# Altium PCB Power_Box_V1.PcbDoc (part 1 of 2)
Units mm, origin at the board's own origin, x right, y up, seen from the top; angles counter-clockwise.
Board outline 100 x 80 mm, 2 copper layers (Top Layer, Bottom Layer); 207 components, 130 nets, 583 pads, 162 vias.
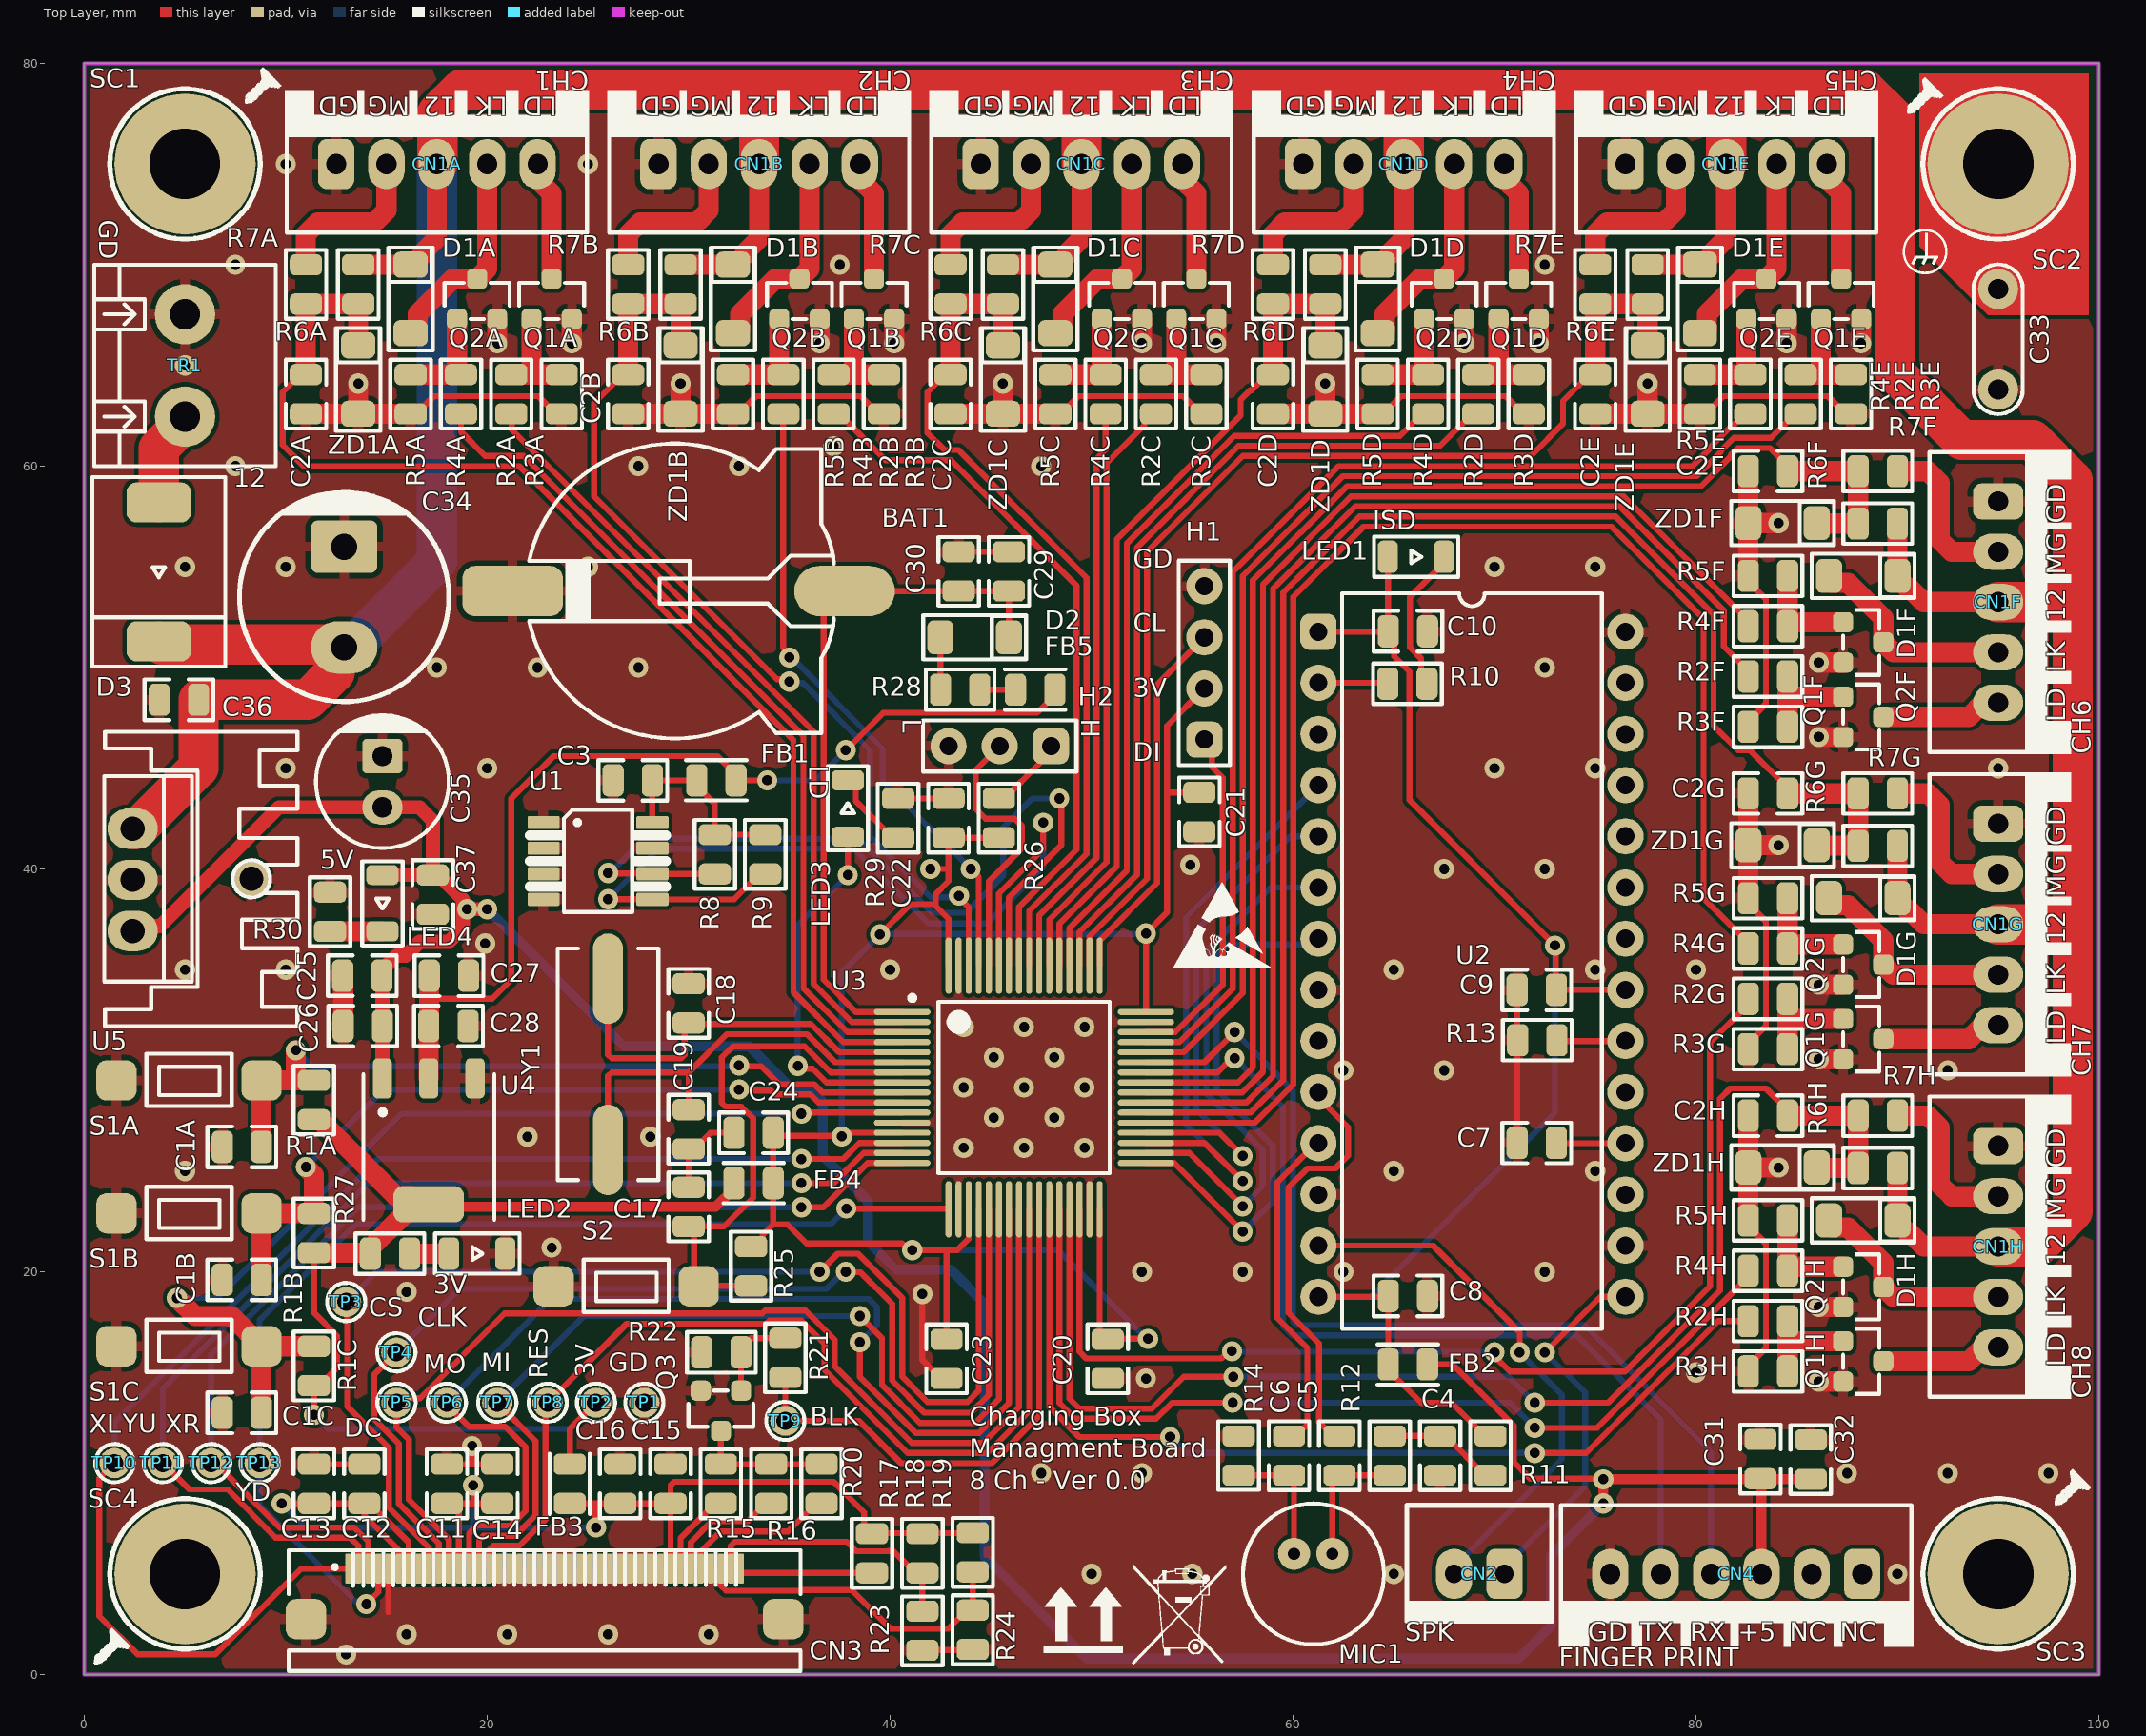
[diagram p0: Top Layer view]
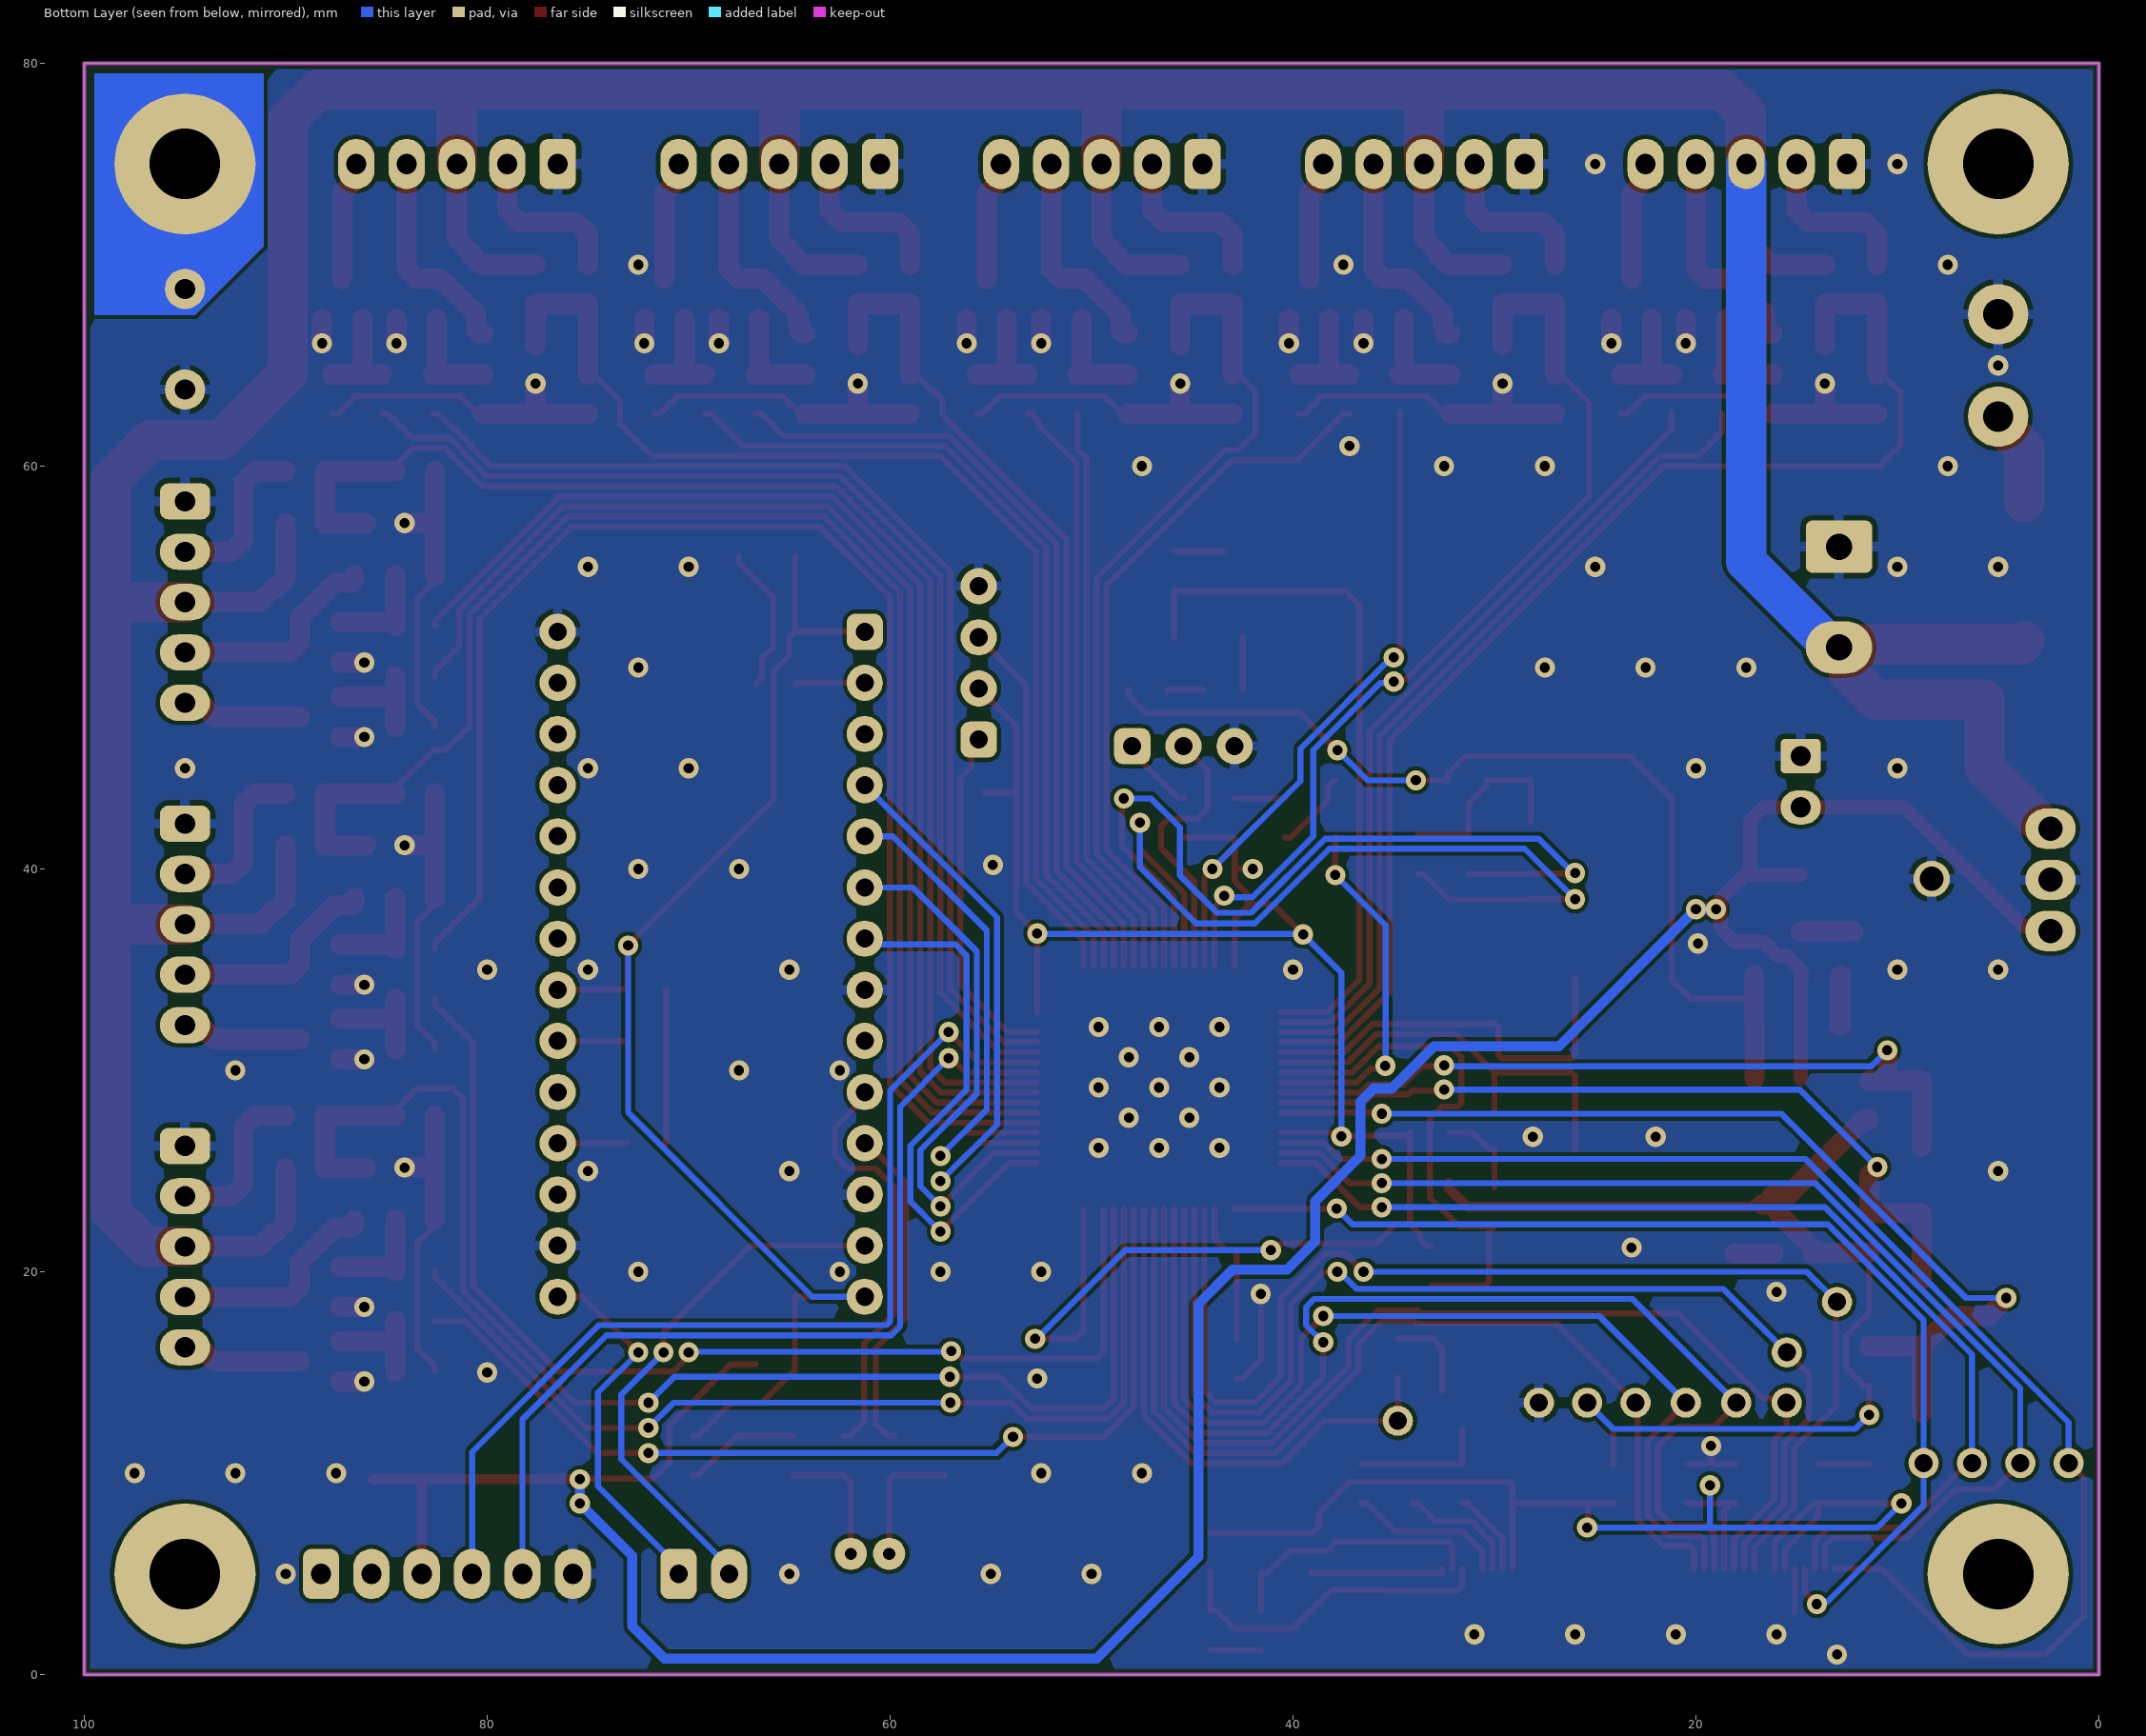
[diagram p1: Bottom Layer view, seen from below]
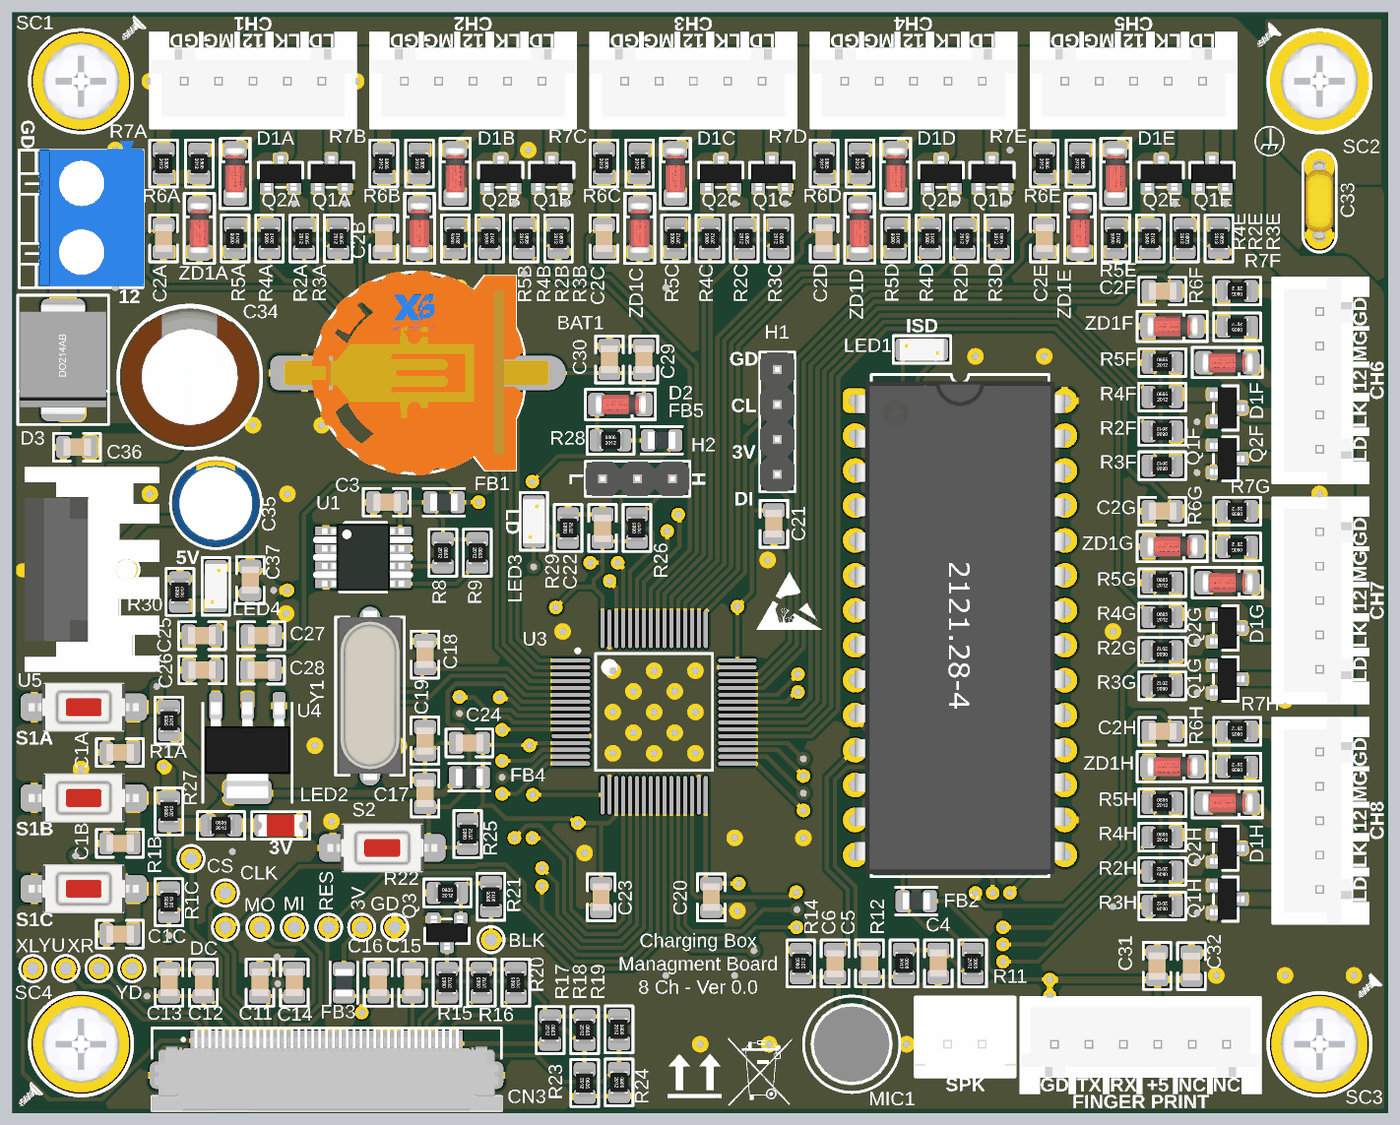
[diagram p3: 3D render of the assembled board from above, using the file's embedded part models]

## Layer stack, top to bottom
Top Solder: solder mask 0.0102, Solder Resist, Dk 3.5
Top Layer: signal copper 0.0356
Dielectric 1: dielectric 0.32, FR-4, Dk 4.8
Bottom Layer: signal copper 0.0356
Bottom Solder: solder mask 0.0102, Solder Resist, Dk 3.5

## Board outline
0,0 100,0 100,80 0,80

## Design rules (kind name [scope] priority, off if disabled: settings)
Clearance [All] p1: gap=0.2 ignorepadtopadclearanceinfootprint=TRUE
ComponentClearance ComponentClearance_ISD [InComponent('U2')] p1: gap=0.254 collisioncheckmode=3 verticalgap=0.1 showdistances=FALSE
ComponentClearance ComponentClearance_STM [InComponent('U3')] p2: gap=4 collisioncheckmode=3 verticalgap=0.254 showdistances=FALSE checkcomponentboundary=TRUE
ComponentClearance [All] p3: gap=0.2 collisioncheckmode=3 verticalgap=0.254 showdistances=FALSE checkcomponentboundary=TRUE
DiffPairsRouting [All] p1: maxlimit=0.3 minlimit=0.2 mostfreqgap=0.3 toplayer_minwidth=0.3 toplayer_maxwidth=0.5 toplayer_prefwidth=0.3 bottomlayer_minwidth=0.3 bottomlayer_maxwidth=0.5 bottomlayer_prefwidth=0.3 maxuncoupledlength=12.7
Height [All] p1: minheight=0 maxheight=25.4 prefheight=17.2
HoleToHoleClearance [All] p1: gap=0.2 allowstackedmicrovias=TRUE
MinimumSolderMaskSliver [All] p1: minsoldermaskwidth=0.2
PlaneConnect [All] p1: pad.planeconnectstyle=Relief pad.reliefexpansion=0.508 pad.reliefentries=4 pad.reliefconductorwidth=0.5 pad.reliefairgap=0.254 via.planeconnectstyle=Direct via.reliefexpansion=0.508 via.reliefentries=4 via.reliefconductorwidth=0.254 via.reliefairgap=0.254
PolygonConnect [All] p1: thpad.connectstyle=Relief thpad.reliefconductorwidth=0.5 thpad.reliefentries=4 thpad.polygonreliefangle="90 Angle" thpad.airgapwidth=0.254 smdpad.connectstyle=Relief smdpad.reliefconductorwidth=0.5 smdpad.reliefentries=4 smdpad.polygonreliefangle="90 Angle" smdpad.airgapwidth=0.254 via.connectstyle=Direct via.reliefconductorwidth=0.254 via.reliefentries=4 via.polygonreliefangle="90 Angle" via.airgapwidth=0.254
RoomDefinition CHANNELG [InComponentClass('CHANNELG')] p1: confinementstyle=ConfineIn formatcopy=TRUE lockcomponents=FALSE outline 81.5,61.25 81.5,45.25 100,45.25 100,61.25
RoomDefinition CHANNELH [InComponentClass('CHANNELH')] p2: confinementstyle=ConfineIn formatcopy=TRUE lockcomponents=FALSE outline 81.5,45.25 81.5,29.25 100,29.25 100,45.25
RoomDefinition CHANNELI [InComponentClass('CHANNELI')] p3: confinementstyle=ConfineIn formatcopy=TRUE lockcomponents=FALSE outline 81.5,29.25 81.5,13.25 100,13.25 100,29.25
RoomDefinition CHANNELB [InComponentClass('CHANNELB')] p4: confinementstyle=ConfineIn formatcopy=FALSE lockcomponents=FALSE outline 9.5,61.5 25.5,61.5 25.5,80 9.5,80
RoomDefinition CHANNELC [InComponentClass('CHANNELC')] p5: confinementstyle=ConfineIn formatcopy=TRUE lockcomponents=FALSE outline 25.5,61.5 41.5,61.5 41.5,80 25.5,80
RoomDefinition CHANNELD [InComponentClass('CHANNELD')] p6: confinementstyle=ConfineIn formatcopy=TRUE lockcomponents=FALSE outline 41.5,61.5 57.5,61.5 57.5,80 41.5,80
RoomDefinition CHANNELE [InComponentClass('CHANNELE')] p7: confinementstyle=ConfineIn formatcopy=TRUE lockcomponents=FALSE outline 57.5,61.5 73.5,61.5 73.5,80 57.5,80
RoomDefinition CHANNELF [InComponentClass('CHANNELF')] p8: confinementstyle=ConfineIn formatcopy=TRUE lockcomponents=FALSE outline 73.5,61.5 89.5,61.5 89.5,80 73.5,80
RoomDefinition TFT [InComponentClass('TFT')] p9: confinementstyle=ConfineOut formatcopy=TRUE lockcomponents=FALSE outline 149,139 344,139 344,169 149,169
RoomDefinition STM_AUX [InComponentClass('STM_AUX')] p10: confinementstyle=ConfineOut formatcopy=TRUE lockcomponents=FALSE outline 149,103 399,103 399,138 149,138
RoomDefinition Power [InComponentClass('Power')] p11: confinementstyle=ConfineOut formatcopy=TRUE lockcomponents=FALSE outline 149,83 225,83 225,102 149,102
RoomDefinition MCU [InComponentClass('MCU')] p12: confinementstyle=ConfineOut formatcopy=TRUE lockcomponents=FALSE outline 275.2,46.6 326,46.6 326,72 275.2,72
RoomDefinition KEYD [InComponentClass('KEYD')] p13: confinementstyle=ConfineIn formatcopy=TRUE lockcomponents=FALSE outline 0,11.8 12.6,11.8 12.6,18.3 0,18.3
RoomDefinition KEYC [InComponentClass('KEYC')] p14: confinementstyle=ConfineIn formatcopy=TRUE lockcomponents=FALSE outline 0,18.4 12.6,18.4 12.6,24.9 0,24.9
RoomDefinition KEYB [InComponentClass('KEYB')] p15: confinementstyle=ConfineIn formatcopy=FALSE lockcomponents=FALSE outline 0,25 12.6,25 12.6,31.5 0,31.5
RoomDefinition ISD1730 [InComponentClass('ISD1730')] p16: confinementstyle=ConfineOut formatcopy=TRUE lockcomponents=FALSE outline 157.8,39.9 268.8,39.9 268.8,80.9 157.8,80.9
RoomDefinition Interface [InComponentClass('Interface')] p17: confinementstyle=ConfineOut formatcopy=TRUE lockcomponents=FALSE outline 166,19 228,19 228,40 166,40
RoomDefinition EEPROM [InComponentClass('EEPROM')] p18: confinementstyle=ConfineOut formatcopy=TRUE lockcomponents=FALSE outline 149,8 177,8 177,17 149,17
RoutingVias [All] p1: holewidth=0.5 width=1 viastyle="Through Hole" minholewidth=0.5 minwidth=1 maxholewidth=0.711 maxwidth=1.27
SilkToSilkClearance [All] p1: silktosilkclearance=0.2
SilkToSolderMaskClearance [IsPad] p1: minsilkscreentomaskgap=0.2 clearancetoexposedcopper=TRUE
SolderMaskExpansion [All] p1: expansion=0.102 istentingtop=FALSE
Width [All] p1: maxlimit=2 minlimit=0.3 preferedwidth=0.5
22 further rules are at their usual default settings.

## Classes and differential pairs
channel class "Digital Input": KEYB KEYC KEYD
channel class Channel: CHANNELB CHANNELC CHANNELD CHANNELE CHANNELF CHANNELG CHANNELH CHANNELI
net class STM32: GND_MCU ISD_MISO ISD_MOSI ISD_SCK ISD_SS MCU_BOOT0 MCU_KEY1 MCU_KEY2 MCU_KEY3 MCU_LED1 MCU_LED2 MCU_LED3 MCU_LED4 MCU_LED5 MCU_LED6 MCU_LED7 MCU_LED8 MCU_LOCK1 MCU_LOCK2 MCU_LOCK3 MCU_LOCK4 MCU_LOCK5 MCU_LOCK6 MCU_LOCK7 MCU_LOCK8 MCU_MAGNET1 MCU_MAGNET2 MCU_MAGNET3 MCU_MAGNET4 MCU_MAGNET5 MCU_MAGNET6 MCU_MAGNET7 MCU_MAGNET8 MCU_NRST MCU_OCS_N MCU_OCS_P MCU_RXD MCU_SCL MCU_SDA MCU_SWCLK MCU_SWDIO MCU_TXD MCU_VBAT NetLED3_1 NetU3_1 NetU3_2 NetU3_3 NetU3_4 NetU3_5 NetU3_7 NetU3_8 NetU3_9 NetU3_10 NetU3_11 NetU3_12 NetU3_13 NetU3_48 NetU3_49 NetU3_50 NetU3_53 NetU3_54 NetU3_55 NetU3_69 NetU3_70 NetU3_79 NetU3_80 NetU3_81 NetU3_82 NetU3_85 NetU3_86 NetU3_87 NetU3_88 NetU3_89 NetU3_90 NetU3_91 NetU3_92 NetU3_93 NetU3_96 NetU3_97 NetU3_98 NetU3_99 NetU3_100 NetU3_103 NetU3_104 NetU3_110 NetU3_111 NetU3_112 NetU3_113 NetU3_114 NetU3_115 NetU3_116 NetU3_117 NetU3_118 NetU3_119 NetU3_122 NetU3_123 NetU3_124 NetU3_125 NetU3_126 NetU3_127 NetU3_128 NetU3_129 NetU3_132 NetU3_133 NetU3_134 NetU3_135 NetU3_139 NetU3_140 NetU3_141 NetU3_142 NetU3_143 TFT_BLK TFT_CLK TFT_CS TFT_DC TFT_MISO TFT_MOSI TFT_RES TFT_XL TFT_XR TFT_YD TFT_YU VCC_MCU
net class MCU_MAGNET[1..8]: MCU_MAGNET1 MCU_MAGNET2 MCU_MAGNET3 MCU_MAGNET4 MCU_MAGNET5 MCU_MAGNET6 MCU_MAGNET7 MCU_MAGNET8
net class MCU_LOCK[1..8]: MCU_LOCK1 MCU_LOCK2 MCU_LOCK3 MCU_LOCK4 MCU_LOCK5 MCU_LOCK6 MCU_LOCK7 MCU_LOCK8
net class MCU_LED[1..8]: MCU_LED1 MCU_LED2 MCU_LED3 MCU_LED4 MCU_LED5 MCU_LED6 MCU_LED7 MCU_LED8
net class MCU_KEY[1..3]: MCU_KEY1 MCU_KEY2 MCU_KEY3
net class ISD: +5 GND_MCU ISD_LED ISD_MIC_N ISD_MIC_P ISD_MISO ISD_MOSI ISD_SCK ISD_SS NetC4_1 NetC5_1 NetC6_1 NetC7_1 NetLED1_2 NetR13_1 NetU2_3 NetU2_9 NetU2_17 NetU2_19 NetU2_22 NetU2_23 NetU2_24 NetU2_25 NetU2_26 NetU2_27 SPK_N SPK_P VCC_ISD
net class FPC: GND_MCU NetCN3_1 NetCN3_2 NetCN3_3 NetCN3_4 NetCN3_8 TFT_CLK TFT_CS TFT_DC TFT_IM0 TFT_IM1 TFT_IM2 TFT_LED_K1 TFT_LED_K2 TFT_LED_K3 TFT_MISO TFT_MOSI TFT_RES TFT_XL TFT_XR TFT_YD TFT_YU VCC_TFT
component class TFT: C11 C12 C13 C14 C15 C16 CN3 FB3 Q3 R15 R16 R17 R18 R19 R20 R21 R22 R23 R24 TP1 TP2 TP3 TP4 TP5 TP6 TP7 TP8 TP9 TP10 TP11 TP12 TP13
component class STM_AUX: BAT1 C17 C18 C19 C20 C21 C22 C23 C24 C25 C26 C27 C28 C29 C30 D2 FB4 FB5 H1 H2 LED2 R25 R26 R27 R28 S2 U4 Y1
component class Power: C34 C35 C36 C37 D3 LED4 R30 TR1 U5
component class MCU: U3
component class KEYD: C1C R1C S1C
component class KEYC: C1B R1B S1B
component class KEYB: C1A R1A S1A
component class ISD1730: C4 C5 C6 C7 C8 C9 C10 CN2 FB2 LED1 MIC1 R10 R11 R12 R13 R14 U2
component class Interface: C31 C32 C33 CN4 LED3 R29 SC1 SC2 SC3 SC4
component class EEPROM: C3 FB1 R8 R9 U1
component class CHANNELI: C2H CN1H D1H Q1H Q2H R2H R3H R4H R5H R6H R7H ZD1H
component class CHANNELH: C2G CN1G D1G Q1G Q2G R2G R3G R4G R5G R6G R7G ZD1G
component class CHANNELG: C2F CN1F D1F Q1F Q2F R2F R3F R4F R5F R6F R7F ZD1F
component class CHANNELF: C2E CN1E D1E Q1E Q2E R2E R3E R4E R5E R6E R7E ZD1E
component class CHANNELE: C2D CN1D D1D Q1D Q2D R2D R3D R4D R5D R6D R7D ZD1D
component class CHANNELD: C2C CN1C D1C Q1C Q2C R2C R3C R4C R5C R6C R7C ZD1C
component class CHANNELC: C2B CN1B D1B Q1B Q2B R2B R3B R4B R5B R6B R7B ZD1B
component class CHANNELB: C2A CN1A D1A Q1A Q2A R2A R3A R4A R5A R6A R7A ZD1A
differential pair MCU_OCS: +MCU_OCS_P -MCU_OCS_N
differential pair ISD_MIC: +ISD_MIC_P -ISD_MIC_N

## Components (designator, comment, footprint, x,y, rotation, side; value= is the part's Value field where it differs from the comment)
BAT1 "Bat Holder 2016-SMD" BAT-HOLDER-SMD-1220 29.5,53.8 r270 top
C1A "CAP Cer 100nF-50V-X7R-SMD" C-0805 7.825,26.2 r180 top value=100nF (schematic designator C1)
C1B "CAP Cer 100nF-50V-X7R-SMD" C-0805 7.825,19.6 r180 top value=100nF (schematic designator C1)
C1C "CAP Cer 100nF-50V-X7R-SMD" C-0805 7.825,13 r180 top value=100nF (schematic designator C1)
C2A "CAP Cer 100nF-50V-X7R-SMD" C-0805 11,63.575 r270 top value=100nF (schematic designator C2)
C2B "CAP Cer 100nF-50V-X7R-SMD" C-0805 27,63.575 r270 top value=100nF (schematic designator C2)
C2C "CAP Cer 100nF-50V-X7R-SMD" C-0805 43,63.575 r270 top value=100nF (schematic designator C2)
C2D "CAP Cer 100nF-50V-X7R-SMD" C-0805 59,63.575 r270 top value=100nF (schematic designator C2)
C2E "CAP Cer 100nF-50V-X7R-SMD" C-0805 75,63.575 r270 top value=100nF (schematic designator C2)
C2F "CAP Cer 100nF-50V-X7R-SMD" C-0805 83.575,59.75 r180 top value=100nF (schematic designator C2)
C2G "CAP Cer 100nF-50V-X7R-SMD" C-0805 83.575,43.75 r180 top value=100nF (schematic designator C2)
C2H "CAP Cer 100nF-50V-X7R-SMD" C-0805 83.575,27.75 r180 top value=100nF (schematic designator C2)
C3 "CAP Cer 100nF-50V-X7R-SMD" C-0805 27.225,44.4 r180 top value=100nF
C4 "CAP Cer 4.7uF-50V-X7R-SMD" C-0805 67.299,10.875 r270 top value=4.7uF
C5 "CAP Cer 100nF-50V-X7R-SMD" C-0805 62.301,10.875 r90 top value=100nF
C6 "CAP Cer 100nF-50V-X7R-SMD" C-0805 59.801,10.875 r90 top value=100nF
C7 "CAP Cer 4.7uF-50V-X7R-SMD" C-0805 72.1,26.4 r180 top value=4.7uF
C8 "CAP Cer 100nF-50V-X7R-SMD" C-0805 65.7,18.8 r0 top value=100nF
C9 "CAP Cer 100nF-50V-X7R-SMD" C-0805 72.1,34 r180 top value=100nF
C10 "CAP Cer 100nF-50V-X7R-SMD" C-0805 65.7,51.8 r0 top value=100nF
C11 "CAP Cer 1uF-50V-X7R-SMD" C-0805 18,9.475 r270 top value=1uF
C12 "CAP Cer 1uF-50V-X7R-SMD" C-0805 13.9,9.475 r270 top value=1uF
C13 "CAP Cer 1uF-50V-X7R-SMD" C-0805 11.4,9.475 r270 top value=1uF
C14 "CAP Cer 1uF-50V-X7R-SMD" C-0805 20.5,9.475 r270 top value=1uF
C15 "CAP Cer 100nF-50V-X7R-SMD" C-0805 29.1,9.475 r270 top value=100nF
C16 "CAP Cer 100nF-50V-X7R-SMD" C-0805 26.6,9.475 r270 top value=100nF
C17 "CAP Cer 100nF-50V-X7R-SMD" C-0805 30,23.225 r270 top value=100nF
C18 "CAP Cer 18pF-50V-X7R-SMD" C-0805 30,33.325 r270 top value=18pF
C19 "CAP Cer 18pF-50V-X7R-SMD" C-0805 30,27.075 r90 top value=18pF
C20 "CAP Cer 100nF-50V-X7R-SMD" C-0805 50.8,15.675 r270 top value=100nF
C21 "CAP Cer 100nF-50V-X7R-SMD" C-0805 55.35,42.825 r270 top value=100nF
C22 "CAP Cer 100nF-50V-X7R-SMD" C-0805 42.9,42.525 r90 top value=100nF
C23 "CAP Cer 100nF-50V-X7R-SMD" C-0805 42.8,15.675 r270 top value=100nF
C24 "CAP Cer 100nF-50V-X7R-SMD" C-0805 33.225,26.9 r180 top value=100nF
C25 "CAP Cer 22uF-50V-X7R-SMD" C-0805 13.8,34.7 r0 top value=22uF
C26 "CAP Cer 100nF-50V-X7R-SMD" C-0805 13.825,32.2 r0 top value=100nF
C27 "CAP Cer 10uF-50V-X7R-SMD" C-0805 18.1,34.7 r180 top value=10uF
C28 "CAP Cer 100nF-50V-X7R-SMD" C-0805 18.075,32.2 r180 top value=100nF
C29 "CAP Cer 10uF-50V-X7R-SMD" C-0805 45.9,54.775 r270 top value=10uF
C30 "CAP Cer 100nF-50V-X7R-SMD" C-0805 43.4,54.775 r270 top value=100nF
C31 "CAP Cer 100nF-50V-X7R-SMD" C-0805 83.2,10.7 r90 top value=100nF
C32 "CAP Cer 1uF-50V-X7R-SMD" C-0805 85.7,10.675 r90 top value=1uF
C33 "CAP Cer 10nF-1KV-X7R-THD" CAP-CER-7x2.5-Ls5 95,66.3 r270 top value=10nF
C34 "CAP Elec 1000uF-25V-10x25-THD" CAP-Elec-10x25-5 12.9,53.5 r90 top value=1000uF
C35 "CAP Elec 1000uF-10V-10x25-THD" CAP-Elec-6.3x12 14.8,44.33 r90 top value=1000uF
C36 "CAP Cer 100nF-50V-X7R-SMD" C-0805 4.7,48.4 r180 top value=100nF
C37 "CAP Cer 100nF-50V-X7R-SMD" C-0805 17.3,38.725 r270 top value=100nF
CN1A "Connector XH-Straight-THD-2.54mm" XH-5 17.5,75 r0 top value=XH (schematic designator CN1)
CN1B "Connector XH-Straight-THD-2.54mm" XH-5 33.5,75 r0 top value=XH (schematic designator CN1)
CN1C "Connector XH-Straight-THD-2.54mm" XH-5 49.5,75 r0 top value=XH (schematic designator CN1)
CN1D "Connector XH-Straight-THD-2.54mm" XH-5 65.5,75 r0 top value=XH (schematic designator CN1)
CN1E "Connector XH-Straight-THD-2.54mm" XH-5 81.5,75 r0 top value=XH (schematic designator CN1)
CN1F "Connector XH-Straight-THD-2.54mm" XH-5 95,53.25 r270 top value=XH (schematic designator CN1)
CN1G "Connector XH-Straight-THD-2.54mm" XH-5 95,37.25 r270 top value=XH (schematic designator CN1)
CN1H "Connector XH-Straight-THD-2.54mm" XH-5 95,21.25 r270 top value=XH (schematic designator CN1)
CN2 "Connector XH-2-Straight-THD-2.54mm" XH-2 69.25,5 r180 top value=XH-2
CN3 "Connector FPC Right-2mm-40 Pin" CN-FPC-40-0.5mm-hor 22.85,4.007 r0 top
CN4 "Connector XH-Straight-THD-2.54mm" XH-6 82,5 r180 top value=XH
D1A "Diode 1N4148-SMD" SOD80 16.2,68.3 r270 top (schematic designator D1)
D1B "Diode 1N4148-SMD" SOD80 32.2,68.3 r270 top (schematic designator D1)
D1C "Diode 1N4148-SMD" SOD80 48.2,68.3 r270 top (schematic designator D1)
D1D "Diode 1N4148-SMD" SOD80 64.2,68.3 r270 top (schematic designator D1)
D1E "Diode 1N4148-SMD" SOD80 80.2,68.3 r270 top (schematic designator D1)
D1F "Diode 1N4148-SMD" SOD80 88.3,54.55 r180 top (schematic designator D1)
D1G "Diode 1N4148-SMD" SOD80 88.3,38.55 r180 top (schematic designator D1)
D1H "Diode 1N4148-SMD" SOD80 88.3,22.55 r180 top (schematic designator D1)
D2 "Diode 1N4148-SMD" SOD80 44.2,51.5 r180 top
D3 "Diode 1N5408-SMD" D-DO214 3.7,54.775 r90 top
FB1 "Ferrite Bead SMD" FB-0805 31.375,44.4 r0 top
FB2 "Ferrite Bead SMD" FB-0805 65.7,15.4 r180 top
FB3 "Ferrite Bead SMD" FB-0805 24.1,9.475 r270 top
FB4 "FERRITE BEAD" FB-0805 33.225,24.4 r0 top
FB5 "Ferrite Bead SMD" FB-0805 47.2,48.9 r180 top
H1 "Header 4x1 Pin -Straight-Male-2.54mm" H-4pin-M-S 55.6,50.23 r90 top
H2 "Header 3x1 Pin -Straight-Male-2.54mm" H-3pin-M-S 45.44,46.1 r180 top
LED1 "LED GREEN-1206-SMD" LED-1206-Y 66.1,55.5 r180 top
LED2 "LED RED-1206-SMD" LED-1206-R 19.5,20.9 r180 top
LED3 "LED GREEN-1206-SMD" LED-1206-Y 37.9,43 r270 top
LED4 "LED GREEN-1206-SMD" LED-1206-Y 14.8,38.3 r90 top
MIC1 "Mic 2.2mm-THD" MIC-2.2mm 61,6 r0 top
Q1A "TR 2N2222-SMD" SOT23-213 23.2,68.3 r0 top value=2N2222 (schematic designator Q1)
Q1B "TR 2N2222-SMD" SOT23-213 39.2,68.3 r0 top value=2N2222 (schematic designator Q1)
Q1C "TR 2N2222-SMD" SOT23-213 55.2,68.3 r0 top value=2N2222 (schematic designator Q1)
Q1D "TR 2N2222-SMD" SOT23-213 71.2,68.3 r0 top value=2N2222 (schematic designator Q1)
Q1E "TR 2N2222-SMD" SOT23-213 87.2,68.3 r0 top value=2N2222 (schematic designator Q1)
Q1F "TR 2N2222-SMD" SOT23-213 88.3,47.55 r270 top value=2N2222 (schematic designator Q1)
Q1G "TR 2N2222-SMD" SOT23-213 88.3,31.55 r270 top value=2N2222 (schematic designator Q1)
Q1H "TR 2N2222-SMD" SOT23-213 88.3,15.55 r270 top value=2N2222 (schematic designator Q1)
Q2A "TR S8050-SMD" SOT23-213 19.5,68.3 r0 top value=S8050 (schematic designator Q2)
Q2B "TR S8050-SMD" SOT23-213 35.5,68.3 r0 top value=S8050 (schematic designator Q2)
Q2C "TR S8050-SMD" SOT23-213 51.5,68.3 r0 top value=S8050 (schematic designator Q2)
Q2D "TR S8050-SMD" SOT23-213 67.5,68.3 r0 top value=S8050 (schematic designator Q2)
Q2E "TR S8050-SMD" SOT23-213 83.5,68.3 r0 top value=S8050 (schematic designator Q2)
Q2F "TR S8050-SMD" SOT23-213 88.3,51.25 r270 top value=S8050 (schematic designator Q2)
Q2G "TR S8050-SMD" SOT23-213 88.3,35.25 r270 top value=S8050 (schematic designator Q2)
Q2H "TR S8050-SMD" SOT23-213 88.3,19.25 r270 top value=S8050 (schematic designator Q2)
Q3 "TR S8050-SMD" SOT23-213 31.6,13.1 r180 top value=S8050
R1A "RES 10K-5%-1/8W-SMD" R-0805 11.4,28.525 r90 top value=10K (schematic designator R1)
R1B "RES 10K-5%-1/8W-SMD" R-0805 11.4,21.925 r90 top value=10K (schematic designator R1)
R1C "RES 10K-5%-1/8W-SMD" R-0805 11.4,15.325 r90 top value=10K (schematic designator R1)
R2A "RES 680R-5%-1/8W-SMD" R-0805 21.197,63.575 r270 top value=680R (schematic designator R2)
R2B "RES 680R-5%-1/8W-SMD" R-0805 37.197,63.575 r270 top value=680R (schematic designator R2)
R2C "RES 680R-5%-1/8W-SMD" R-0805 53.197,63.575 r270 top value=680R (schematic designator R2)
R2D "RES 680R-5%-1/8W-SMD" R-0805 69.197,63.575 r270 top value=680R (schematic designator R2)
R2E "RES 680R-5%-1/8W-SMD" R-0805 85.197,63.575 r270 top value=680R (schematic designator R2)
R2F "RES 680R-5%-1/8W-SMD" R-0805 83.575,49.553 r180 top value=680R (schematic designator R2)
R2G "RES 680R-5%-1/8W-SMD" R-0805 83.575,33.553 r180 top value=680R (schematic designator R2)
R2H "RES 680R-5%-1/8W-SMD" R-0805 83.575,17.553 r180 top value=680R (schematic designator R2)
R3A "RES 47K-5%-1/8W-SMD" R-0805 23.697,63.575 r270 top value=47K (schematic designator R3)
R3B "RES 47K-5%-1/8W-SMD" R-0805 39.697,63.575 r270 top value=47K (schematic designator R3)
R3C "RES 47K-5%-1/8W-SMD" R-0805 55.697,63.575 r270 top value=47K (schematic designator R3)
R3D "RES 47K-5%-1/8W-SMD" R-0805 71.697,63.575 r270 top value=47K (schematic designator R3)
R3E "RES 47K-5%-1/8W-SMD" R-0805 87.697,63.575 r270 top value=47K (schematic designator R3)
R3F "RES 47K-5%-1/8W-SMD" R-0805 83.575,47.053 r180 top value=47K (schematic designator R3)
R3G "RES 47K-5%-1/8W-SMD" R-0805 83.575,31.053 r180 top value=47K (schematic designator R3)
R3H "RES 47K-5%-1/8W-SMD" R-0805 83.575,15.053 r180 top value=47K (schematic designator R3)
R4A "RES 100R-5%-1/8W-SMD" R-0805 18.701,63.575 r90 top value=100R (schematic designator R4)
R4B "RES 100R-5%-1/8W-SMD" R-0805 34.701,63.575 r90 top value=100R (schematic designator R4)
R4C "RES 100R-5%-1/8W-SMD" R-0805 50.701,63.575 r90 top value=100R (schematic designator R4)
R4D "RES 100R-5%-1/8W-SMD" R-0805 66.701,63.575 r90 top value=100R (schematic designator R4)
R4E "RES 100R-5%-1/8W-SMD" R-0805 82.701,63.575 r90 top value=100R (schematic designator R4)
R4F "RES 100R-5%-1/8W-SMD" R-0805 83.575,52.049 r0 top value=100R (schematic designator R4)
R4G "RES 100R-5%-1/8W-SMD" R-0805 83.575,36.049 r0 top value=100R (schematic designator R4)
R4H "RES 100R-5%-1/8W-SMD" R-0805 83.575,20.049 r0 top value=100R (schematic designator R4)
R5A "RES 1K-5%-1/8W-SMD" R-0805 16.202,63.575 r90 top value=1K (schematic designator R5)
R5B "RES 1K-5%-1/8W-SMD" R-0805 32.202,63.575 r90 top value=1K (schematic designator R5)
R5C "RES 1K-5%-1/8W-SMD" R-0805 48.202,63.575 r90 top value=1K (schematic designator R5)
R5D "RES 1K-5%-1/8W-SMD" R-0805 64.202,63.575 r90 top value=1K (schematic designator R5)
R5E "RES 1K-5%-1/8W-SMD" R-0805 80.202,63.575 r90 top value=1K (schematic designator R5)
R5F "RES 1K-5%-1/8W-SMD" R-0805 83.575,54.548 r0 top value=1K (schematic designator R5)
R5G "RES 1K-5%-1/8W-SMD" R-0805 83.575,38.548 r0 top value=1K (schematic designator R5)
R5H "RES 1K-5%-1/8W-SMD" R-0805 83.575,22.548 r0 top value=1K (schematic designator R5)
R6A "RES 47K-5%-1/8W-SMD" R-0805 13.6,69.025 r270 top value=47K (schematic designator R6)
R6B "RES 47K-5%-1/8W-SMD" R-0805 29.6,69.025 r270 top value=47K (schematic designator R6)
R6C "RES 47K-5%-1/8W-SMD" R-0805 45.6,69.025 r270 top value=47K (schematic designator R6)
R6D "RES 47K-5%-1/8W-SMD" R-0805 61.6,69.025 r270 top value=47K (schematic designator R6)
R6E "RES 47K-5%-1/8W-SMD" R-0805 77.6,69.025 r270 top value=47K (schematic designator R6)
R6F "RES 47K-5%-1/8W-SMD" R-0805 89.025,57.15 r180 top value=47K (schematic designator R6)
R6G "RES 47K-5%-1/8W-SMD" R-0805 89.025,41.15 r180 top value=47K (schematic designator R6)
R6H "RES 47K-5%-1/8W-SMD" R-0805 89.025,25.15 r180 top value=47K (schematic designator R6)
R7A "RES 470R-5%-1/8W-SMD" R-0805 11,69.025 r270 top value=470R (schematic designator R7)
R7B "RES 470R-5%-1/8W-SMD" R-0805 27,69.025 r270 top value=470R (schematic designator R7)
R7C "RES 470R-5%-1/8W-SMD" R-0805 43,69.025 r270 top value=470R (schematic designator R7)
R7D "RES 470R-5%-1/8W-SMD" R-0805 59,69.025 r270 top value=470R (schematic designator R7)
R7E "RES 470R-5%-1/8W-SMD" R-0805 75,69.025 r270 top value=470R (schematic designator R7)
R7F "RES 470R-5%-1/8W-SMD" R-0805 89.025,59.75 r180 top value=470R (schematic designator R7)
R7G "RES 470R-5%-1/8W-SMD" R-0805 89.025,43.75 r180 top value=470R (schematic designator R7)
R7H "RES 470R-5%-1/8W-SMD" R-0805 89.025,27.75 r180 top value=470R (schematic designator R7)
R8 "RES 4.7K-5%-1/8W-SMD" R-0805 31.3,40.725 r270 top value=4.7K
R9 "RES 4.7K-5%-1/8W-SMD" R-0805 33.8,40.725 r270 top value=4.7K
R10 "RES 1K-5%-1/8W-SMD" R-0805 65.675,49.2 r180 top value=1K
R11 "RES 4.7K-5%-1/8W-SMD" R-0805 69.8,10.875 r270 top value=4.7K
R12 "RES 4.7K-5%-1/8W-SMD" R-0805 64.799,10.875 r270 top value=4.7K
R13 "RES 82K-5%-1/8W-SMD" R-0805 72.125,31.5 r180 top value=82K
R14 "RES 4.7K-5%-1/8W-SMD" R-0805 57.3,10.875 r90 top value=4.7K
R15 "RES 10R-5%-1/8W-SMD" R-0805 31.6,9.475 r90 top value=10R
R16 "RES 10R-5%-1/8W-SMD" R-0805 34.1,9.475 r90 top value=10R
R17 "RES 4.7K-5%-1/8W-SMD" R-0805 39.1,6.025 r270 top value=4.7K
R18 "RES 4.7K-5%-1/8W-SMD" R-0805 41.6,6.025 r270 top value=4.7K
R19 "RES 4.7K-5%-1/8W-SMD" R-0805 44.1,6.075 r270 top value=4.7K
R20 "RES 10R-5%-1/8W-SMD" R-0805 36.6,9.475 r90 top value=10R
R21 "RES 1K-5%-1/8W-SMD" R-0805 34.8,15.725 r90 top value=1K
R22 "RES 10K-5%-1/8W-SMD" R-0805 31.625,16 r0 top value=10K
R23 "RES 4.7K-5%-1/8W-SMD" R-0805 41.6,2.175 r270 top value=4.7K
R24 "RES 4.7K-5%-1/8W-SMD" R-0805 44.1,2.225 r270 top value=4.7K
R25 "RES 10K-5%-1/8W-SMD" R-0805 33.1,20.275 r90 top value=10K
R26 "RES 10K-5%-1/8W-SMD" R-0805 45.4,42.525 r90 top value=10K
R27 "RES 2.2K-5%-1/8W-SMD" R-0805 15.175,20.9 r0 top value=2.2K
R28 "RES 1K-5%-1/8W-SMD" R-0805 43.475,48.9 r0 top value=1K
R29 "RES 2.2K-5%-1/8W-SMD" R-0805 40.4,42.525 r90 top value=2.2K
R30 "RES 2.2K-5%-1/8W-SMD" R-0805 12.2,37.875 r90 top value=2.2K
S1A "Push Button 3x6mm-2Pin-SMD" SW-SMD-2pin-3x6 5.2,29.5 r0 top (schematic designator S1)
S1B "Push Button 3x6mm-2Pin-SMD" SW-SMD-2pin-3x6 5.2,22.9 r0 top (schematic designator S1)
S1C "Push Button 3x6mm-2Pin-SMD" SW-SMD-2pin-3x6 5.2,16.3 r0 top (schematic designator S1)
S2 "Push Button 3x6mm-2Pin-SMD" SW-SMD-2pin-3x6 26.9,19.275 r0 top
SC1 "Screw 3mm" Screw_M3 5,75 r180 top locked
SC2 "Screw 3mm" Screw_M3 95,75 r180 top locked
SC3 "Screw 3mm" Screw_M3 95,5 r0 top locked
SC4 "Screw 3mm" Screw_M3 5,5 r0 top locked
TP1 "" "TEST POINT-DIP" 27.8,13.5 r90 top net-tie
TP2 "" "TEST POINT-DIP" 25.4,13.5 r90 top net-tie
TP3 "" "TEST POINT-DIP" 13,18.5 r90 top net-tie
TP4 "" "TEST POINT-DIP" 15.488,16 r90 top net-tie
TP5 "" "TEST POINT-DIP" 15.5,13.5 r90 top net-tie
TP6 "" "TEST POINT-DIP" 18,13.5 r90 top net-tie
TP7 "" "TEST POINT-DIP" 20.5,13.5 r90 top net-tie
TP8 "" "TEST POINT-DIP" 23,13.5 r180 top net-tie
TP9 "" "TEST POINT-DIP" 34.8,12.6 r180 top net-tie
TP10 "" "TEST POINT-DIP" 1.5,10.5 r180 top net-tie
TP11 "" "TEST POINT-DIP" 3.9,10.5 r180 top net-tie
TP12 "" "TEST POINT-DIP" 6.3,10.5 r90 top net-tie
TP13 "" "TEST POINT-DIP" 8.7,10.5 r90 top net-tie
TR1 "Terminal KF301-2Pin-5.08mm-Straight" KF301-2pin 5,65 r270 top
U1 "IC AT24C04-SMD" SOIC8 25.5,40.395 r0 top
U2 "IC ISD1730-SMD" DIP28-wide 68.88,35.27 r0 top locked
U3 "STM32F103RCT6" STM-LQFP64_N 46.65,29.15 r0 top
U4 "Reg AMS1117-3.3V-SMD" SOT223 17.1,26.396 r180 top
U5 "Reg 7805-5V-THD" TO220-HEARSINK-1 5.35,39.46 r270 top
Y1 "Crystal 8MHz-SMD" CRYSTAL-SMD 26,30.3 r270 top value=8MHz
ZD1A "Zener -3.3V-SMD" SOD80 13.6,64.3 r270 top (schematic designator ZD1)
ZD1B "Zener -3.3V-SMD" SOD80 29.6,64.3 r270 top (schematic designator ZD1)
ZD1C "Zener -3.3V-SMD" SOD80 45.6,64.3 r270 top (schematic designator ZD1)
ZD1D "Zener -3.3V-SMD" SOD80 61.6,64.3 r270 top (schematic designator ZD1)
ZD1E "Zener -3.3V-SMD" SOD80 77.6,64.3 r270 top (schematic designator ZD1)
ZD1F "Zener -3.3V-SMD" SOD80 84.3,57.175 r180 top (schematic designator ZD1)
ZD1G "Zener -3.3V-SMD" SOD80 84.3,41.175 r180 top (schematic designator ZD1)
ZD1H "Zener -3.3V-SMD" SOD80 84.3,25.175 r180 top (schematic designator ZD1)

## Footprints (in the part's own frame and the unit in brackets; to place one, negate y for a bottom-side part, rotate by r counter-clockwise, add the part's x,y. Pads: shape width x height; smd on the part's side, far side on the other; paste and mask are expansions set on the pad)
BAT-HOLDER-SMD-1220 [mm]
  oval 2.5x5 smd: 1(0,8.238)
  rrect50% 2.5x5 smd: 2(0,-8.237)
  silkscreen extent -7.32,-7.41 7.32,7.71, body extent -7.45,-9.74 7.45,9.51, height 4.2
C-0805 [mm]
  rrect50% 1.05x1.6 smd: 1(-0.975,0) 2(0.975,0)
  silkscreen extent -1.71,-1.01 1.71,1.01, body extent -1.03,-0.63 0.97,0.63, height 0.61
CAP-CER-7x2.5-Ls5 [mm] "P2P : 5mm"
  round 2 hole 1: 1(-2.5,0) 2(2.5,0)
  silkscreen extent -3.72,-1.22 3.72,1.22, body extent -2.85,-1 2.84,1, height 5.5
CAP-Elec-6.3x12 [mm] "P2P : 2.54mm"
  oval 1.7x2 hole 1: 1(-1.27,0)
  rrect25% 1.7x2 hole 1: 2(1.27,0)
  silkscreen extent -3.3,-3.3 3.3,3.3, body extent -3.18,-3.15 3.13,3.15, height 12.71
CAP-Elec-10x25-5 [mm] "P2P : 5mm"
  oval 2.6x3.3 hole 1.3: 1(-2.5,0)
  rrect25% 2.6x3.3 hole 1.3: 2(2.5,0)
  silkscreen extent -5.2,-5.2 5.2,5.2, body extent -5,-5 5,5, height 25.2
CN-FPC-40-0.5mm-hor [mm]
  rrect50% 0.3x1.5 smd: 1(-9.75,1.258) 2(-9.25,1.258) 3(-8.75,1.258) 4(-8.25,1.258) 5(-7.75,1.258) 6(-7.25,1.258) 7(-6.75,1.258) 8(-6.25,1.258) 9(-5.75,1.258) 10(-5.25,1.258) 11(-4.75,1.258) 12(-4.25,1.258) 13(-3.75,1.258) 14(-3.25,1.258) 15(-2.75,1.258) 16(-2.25,1.258) 17(-1.75,1.258) 18(-1.25,1.258) 19(-0.75,1.258) 20(-0.25,1.258) 21(0.25,1.258) 22(0.75,1.258) 23(1.25,1.258) 24(1.75,1.258) 25(2.25,1.258) 26(2.75,1.258) 27(3.25,1.258) 28(3.75,1.258) 29(4.25,1.258) 30(4.75,1.258) 31(5.25,1.258) 32(5.75,1.258) 33(6.25,1.258) 34(6.75,1.258) 35(7.25,1.258) 36(7.75,1.258) 37(8.25,1.258) 38(8.75,1.258) 39(9.25,1.258) 40(9.75,1.258)
  rrect50% 2x2 smd: 41(-11.85,-1.257) 42(11.85,-1.257)
  silkscreen extent -12.7,-3.82 12.7,2.16, body extent -12.75,-3.86 12.75,1.54, height 2.12
CRYSTAL-SMD [mm]
  oval 4.5x1.5 smd: 1(-4.25,0) 2(4.25,0)
  silkscreen extent -5.75,-2.5 5.75,2.5, body extent -6.21,-2.25 6.09,2.25, height 5.18
D-DO214 [mm]
  rrect50% 2x3.2 smd: 1(3.425,0) 2(-3.475,0)
  silkscreen extent -4.72,-3.3 4.68,3.3, body extent -4.06,-3.15 4.06,3.15
DIP28-wide [mm]
  rrect50% 1.8x1.8 hole 0.9: 1(-7.62,16.51)
  round 1.8 hole 0.9: 2(-7.62,13.97) 3(-7.62,11.43) 4(-7.62,8.89) 5(-7.62,6.35) 6(-7.62,3.81) 7(-7.62,1.27) 8(-7.62,-1.27) 9(-7.62,-3.81) 10(-7.62,-6.35) 11(-7.62,-8.89) 12(-7.62,-11.43) 13(-7.62,-13.97) 14(-7.62,-16.51) 15(7.62,-16.51) 16(7.62,-13.97) 17(7.62,-11.43) 18(7.62,-8.89) 19(7.62,-6.35) 20(7.62,-3.81) 21(7.62,-1.27) 22(7.62,1.27) 23(7.62,3.81) 24(7.62,6.35) 25(7.62,8.89) 26(7.62,11.43) 27(7.62,13.97) 28(7.62,16.51)
  silkscreen extent -6.45,-18.1 6.45,18.41, body extent -7.65,-17.88 7.65,17.92, height 6.01
FB-0805 [mm]
  rrect50% 1.05x1.6 smd: 1(-0.975,0) 2(0.975,0)
  silkscreen extent -1.5,-1 1.5,1, body extent -1,-0.63 1,0.63, height 0.84
H-3pin-M-S [mm]
  rrect50% 1.8x1.8 hole 0.9: 1(-2.54,0)
  round 1.8 hole 0.9: 2(0,0) 3(2.54,0)
  silkscreen extent -3.81,-1.27 3.81,1.27, body extent -3.79,-1.25 3.79,1.25, height 8.6
H-4pin-M-S [mm]
  rrect50% 1.8x1.8 hole 0.9: 1(-3.81,0)
  round 1.8 hole 0.9: 2(-1.27,0) 3(1.27,0) 4(3.81,0)
  silkscreen extent -5.08,-1.27 5.08,1.27, body extent -5.06,-1.25 5.06,1.25, height 8.6
KF301-2pin [mm] "P2P : 5.08mm"
  round 3 hole 1.5: 1(-2.54,0) 2(2.54,0)
  silkscreen extent -5,-4.5 5,4.5, body extent -5.68,-3.05 4.92,4.55, height 10
LED-1206-R [mm]
  rrect50% 1x1.6 smd: 1(1.4,0) 2(-1.4,0)
  silkscreen extent -2.11,-1 2.08,1, body extent -1.6,-0.8 1.6,0.8, height 1.1
LED-1206-Y [mm]
  rrect50% 1x1.6 smd: 1(1.4,0) 2(-1.4,0)
  silkscreen extent -2.11,-1 2.08,1, body extent -1.6,-0.8 1.6,0.8, height 1.11
MIC-2.2mm [mm]
  round 1.6 hole 0.6: 1(0.95,0) 2(-0.95,0)
  silkscreen extent -3.49,-4.5 3.51,2.5, body extent -2.99,-3.99 3,2, height 2.35
R-0805 [mm]
  rrect50% 1.05x1.6 smd: 1(-0.975,0) 2(0.975,0)
  silkscreen extent -1.71,-1.01 1.71,1.01, body extent -1,-0.63 1,0.63, height 0.44
Screw_M3 [mm] "H : 3.5mm"
  round 7 hole 3.5: 1(0,0)
  silkscreen extent -3.73,-3.73 3.73,3.73, body extent -2.79,-2.8 2.79,2.8, height 2.4
SOD80 [mm]
  rrect50% 1.3x1.7 smd: 1(1.7,0) 2(-1.7,0)
  silkscreen extent -2.55,-1.1 2.55,1.1, body extent -1.88,-0.79 1.82,0.79, height 1.6
SOIC8 [mm]
  rrect25% 1.6x0.65 smd: 1(-2.7,1.905) 2(-2.7,0.635) 3(-2.7,-0.635) 4(-2.7,-1.905) 5(2.7,-1.905) 6(2.7,-0.635) 7(2.7,0.635) 8(2.7,1.905)
  silkscreen extent -3.38,-2.54 3.38,2.54, body extent -3.01,-2.45 2.99,2.45, height 1.75
SOT23-213 [mm]
  rrect50% 1x1 smd mask+0.07: 1(1,-1) 2(-1,-1) 3(0,1)
  silkscreen extent -1.61,-1 1.61,0.79, body extent -1.5,-1.25 1.5,1.25, height 1.09
SOT223 [mm]
  rrect50% 0.95x2 smd: 1(-2.3,-3.204) 2(0,-3.204) 3(2.3,-3.204)
  rrect50% 3.5x1.8 smd: 4(0,3.048)
  silkscreen extent -3.25,-3.4 3.25,3.81, body extent -3.15,-3.48 3.15,3.52, height 1.6
STM-LQFP64_N [mm] "Thin QFP, 64-Leads, Body 10x10mm, Pitch 0.5mm, IPC Medium Density"
  oval 2.8x0.3 smd: 1(-6.05,3.75) 2(-6.05,3.25) 3(-6.05,2.75) 4(-6.05,2.25) 5(-6.05,1.75) 6(-6.05,1.25) 7(-6.05,0.75) 8(-6.05,0.25) 9(-6.05,-0.25) 10(-6.05,-0.75) 11(-6.05,-1.25) 12(-6.05,-1.75) 13(-6.05,-2.25) 14(-6.05,-2.75) 15(-6.05,-3.25) 16(-6.05,-3.75) 33(6.05,-3.75) 34(6.05,-3.25) 35(6.05,-2.75) 36(6.05,-2.25) 37(6.05,-1.75) 38(6.05,-1.25) 39(6.05,-0.75) 40(6.05,-0.25) 41(6.05,0.25) 42(6.05,0.75) 43(6.05,1.25) 44(6.05,1.75) 45(6.05,2.25) 46(6.05,2.75) 47(6.05,3.25) 48(6.05,3.75)
  oval 0.3x2.8 smd: 17(-3.75,-6.05) 18(-3.25,-6.05) 19(-2.75,-6.05) 20(-2.25,-6.05) 21(-1.75,-6.05) 22(-1.25,-6.05) 23(-0.75,-6.05) 24(-0.25,-6.05) 25(0.25,-6.05) 26(0.75,-6.05) 27(1.25,-6.05) 28(1.75,-6.05) 29(2.25,-6.05) 30(2.75,-6.05) 31(3.25,-6.05) 32(3.75,-6.05) 49(3.75,6.05) 50(3.25,6.05) 51(2.75,6.05) 52(2.25,6.05) 53(1.75,6.05) 54(1.25,6.05) 55(0.75,6.05) 56(0.25,6.05) 57(-0.25,6.05) 58(-0.75,6.05) 59(-1.25,6.05) 60(-1.75,6.05) 61(-2.25,6.05) 62(-2.75,6.05) 63(-3.25,6.05) 64(-3.75,6.05)
  silkscreen extent -5.67,-4.25 4.25,4.57, body extent -5,-5 5,5, height 1.6
SW-SMD-2pin-3x6 [mm]
  rrect50% 2x2 smd: 1(-3.6,0) 2(3.6,0)
  silkscreen extent -2.11,-1.27 2.11,1.33, body extent -4,-1.8 4,1.8, height 2.5
"TEST POINT-DIP" [mm]
  round 1.5 hole 0.9: 1(0,0)
  silkscreen extent -0.95,-0.95 0.95,0.95
TO220-HEARSINK-1 [mm]
  oval 2x2.5 hole 1.2: 1(-2.54,-2.95) 2(0,-2.95) 3(2.54,-2.95)
  round 1.8 hole 1.2: 4(-0.05,2.95)
  silkscreen extent -7.35,-4.35 7.27,5.23, body extent -7.5,-4.45 7.4,5.35, height 21.1
XH-2 [mm]
  rrect50% 1.8x2.5 hole 0.9: 1(-1.25,0)
  oval 1.8x2.5 hole 0.9: 2(1.25,0)
  silkscreen extent -3.68,-3.4 3.68,2.41, body extent -3.69,-3.4 3.71,2.35, height 7
XH-5 [mm]
  rrect50% 1.8x2.5 hole 1: 1(-5,0)
  oval 1.8x2.5 hole 1: 2(-2.5,0) 3(0,0) 4(2.5,0) 5(5,0)
  silkscreen extent -7.45,-3.4 7.45,2.35, body extent -7.45,-3.39 7.45,2.36, height 7.1
XH-6 [mm]
  rrect50% 1.8x2.5 hole 1: 1(-6.25,0)
  oval 1.8x2.5 hole 1: 2(-3.75,0) 3(-1.25,0) 4(1.25,0) 5(3.75,0) 6(6.25,0)
  silkscreen extent -8.7,-3.4 8.7,2.35, body extent -8.7,-3.38 8.7,2.37, height 7.1

## Part data
BAT1: library part "BATTERY HOLDER", "BATTERY", Voltage=3V, ComponentLink1Description=Linkedin, ComponentLink1URL=https://ir.linkedin.com/in/mahdi-bagherzade, Phone Number="0915 8700 314", Published Date=9-15-2024, Publisher="Mahdi Bagherzadeh", Size=2016, Type=SMD
C1A C1B C1C C2A C2B C2C C2D C2E C2F C2G C2H C3 C4 C5 C6 C7 C8 C9 C10 C11 C12 C13 C14 C15 C16 C17 C18 C19 C20 C21 C22 C23 C24 C25 C26 C27 C28 C29 C30 C31 C32 C36 C37: library part CAP-CER, "CAPACITOR", Tolerance=X7R, Voltage=50V, ComponentLink1Description=Linkedin, ComponentLink1URL=https://ir.linkedin.com/in/mahdi-bagherzade, Phone Number="0915 8700 314", Published Date=9-15-2024, Publisher="Mahdi Bagherzadeh", Type=SMD
C33: library part CAP-CER, "CAPACITOR", Tolerance=X7R, Voltage=1KV, ComponentLink1Description=Linkedin, ComponentLink1URL=https://ir.linkedin.com/in/mahdi-bagherzade, Phone Number="0915 8700 314", Published Date=9-15-2024, Publisher="Mahdi Bagherzadeh", Type=THD
C34: library part CAP-ELEC, "CAPACITOR", Voltage=25V, ComponentLink1Description=Linkedin, ComponentLink1URL=https://ir.linkedin.com/in/mahdi-bagherzade, Phone Number="0915 8700 314", Published Date=9-15-2024, Publisher="Mahdi Bagherzadeh", Size=10x25, Type=THD
C35: library part CAP-ELEC, "CAPACITOR", Voltage=10V, ComponentLink1Description=Linkedin, ComponentLink1URL=https://ir.linkedin.com/in/mahdi-bagherzade, Phone Number="0915 8700 314", Published Date=9-15-2024, Publisher="Mahdi Bagherzadeh", Size=10x25, Type=THD
CN1A CN1B CN1C CN1D CN1E CN1F CN1G CN1H: library part CN-5pin, "CONNECTOR", ComponentLink1Description=Linkedin, ComponentLink1URL=https://ir.linkedin.com/in/mahdi-bagherzade, Phone Number="0915 8700 314", Published Date=9-15-2024, Publisher="Mahdi Bagherzadeh", Size=2.54mm, Type=Straight-THD
CN2: library part CN-2pin, "CONNECTOR", ComponentLink1Description=Linkedin, ComponentLink1URL=https://ir.linkedin.com/in/mahdi-bagherzade, Phone Number="0915 8700 314", Published Date=9-15-2024, Publisher="Mahdi Bagherzadeh", Size=2.54mm, Type=Straight-THD
CN3: library part CN-FPC-40pin, "CONNECTOR", ComponentLink1Description=Linkedin, ComponentLink1URL=https://ir.linkedin.com/in/mahdi-bagherzade, Phone Number="0915 8700 314", Published Date=9-15-2024, Publisher="Mahdi Bagherzadeh", Size="2mm-40 Pin", Type=Right
CN4: library part CN-6pin, "CONNECTOR", ComponentLink1Description=Linkedin, ComponentLink1URL=https://ir.linkedin.com/in/mahdi-bagherzade, Phone Number="0915 8700 314", Published Date=9-15-2024, Publisher="Mahdi Bagherzadeh", Size=2.54mm, Type=Straight-THD
D1A D1B D1C D1D D1E D1F D1G D1H D2 D3: library part DIODE, "DIODE", ComponentLink1Description=Linkedin, ComponentLink1URL=https://ir.linkedin.com/in/mahdi-bagherzade, Phone Number="0915 8700 314", Published Date=9-15-2024, Publisher="Mahdi Bagherzadeh", Type=SMD
  D1A D1B D1C D1D D1E D1F D1G D1H D2: Code=1N4148
  D3: Code=1N5408
FB1 FB2 FB3 FB5: library part "FERRITE BEAD", "INDUCATOR", ComponentLink1Description=Linkedin, ComponentLink1URL=https://ir.linkedin.com/in/mahdi-bagherzade, Phone Number="0915 8700 314", Published Date=9-15-2024, Publisher="Mahdi Bagherzadeh", Type=SMD
FB4: "INDUCATOR", ComponentLink1Description=Linkedin, ComponentLink1URL=https://ir.linkedin.com/in/mahdi-bagherzade, Phone Number="0915 8700 314", Published Date=9-15-2024, Publisher="Mahdi Bagherzadeh"
H1: library part HEADER-4pin, "HEADER", ComponentLink1Description=Linkedin, ComponentLink1URL=https://ir.linkedin.com/in/mahdi-bagherzade, Phone Number="0915 8700 314", Published Date=9-15-2024, Publisher="Mahdi Bagherzadeh", Size=2.54mm, Type=Straight-Male
H2: library part HEADER-3pin, "HEADER", ComponentLink1Description=Linkedin, ComponentLink1URL=https://ir.linkedin.com/in/mahdi-bagherzade, Phone Number="0915 8700 314", Published Date=9-15-2024, Publisher="Mahdi Bagherzadeh", Size=2.54mm, Type=Straight-Male
LED1 LED3 LED4: library part LED, "LED", Color=GREEN, ComponentLink1Description=Linkedin, ComponentLink1URL=https://ir.linkedin.com/in/mahdi-bagherzade, Phone Number="0915 8700 314", Published Date=9-15-2024, Publisher="Mahdi Bagherzadeh", Size=1206, Type=SMD
LED2: library part LED, "LED", Color=RED, ComponentLink1Description=Linkedin, ComponentLink1URL=https://ir.linkedin.com/in/mahdi-bagherzade, Phone Number="0915 8700 314", Published Date=9-15-2024, Publisher="Mahdi Bagherzadeh", Size=1206, Type=SMD
MIC1: library part MIC, "MIC", ComponentLink1Description=Linkedin, ComponentLink1URL=https://ir.linkedin.com/in/mahdi-bagherzade, Phone Number="0915 8700 314", Published Date=9-15-2024, Publisher="Mahdi Bagherzadeh", Size=2.2mm, Type=THD
Q1A Q1B Q1C Q1D Q1E Q1F Q1G Q1H: library part 2N2222, "TRANSISTOR", Code=1P, ComponentLink1Description=Linkedin, ComponentLink1URL=https://ir.linkedin.com/in/mahdi-bagherzade, Phone Number="0915 8700 314", Published Date=9-15-2024, Publisher="Mahdi Bagherzadeh", Type=SMD
Q2A Q2B Q2C Q2D Q2E Q2F Q2G Q2H Q3: library part S8050, "TRANSISTOR", Code=J3Y, ComponentLink1Description=Linkedin, ComponentLink1URL=https://ir.linkedin.com/in/mahdi-bagherzade, Phone Number="0915 8700 314", Published Date=9-15-2024, Publisher="Mahdi Bagherzadeh", Type=SMD
R1A R1B R1C R2A R2B R2C R2D R2E R2F R2G R2H R3A R3B R3C R3D R3E R3F R3G R3H R4A R4B R4C R4D R4E R4F R4G R4H R5A R5B R5C R5D R5E R5F R5G R5H R6A R6B R6C R6D R6E R6F R6G R6H R7A R7B R7C R7D R7E R7F R7G R7H R8 R9 R10 R11 R12 R13 R14 R15 R16 R17 R18 R19 R20 R21 R22 R23 R24 R25 R26 R27 R28 R29 R30: library part RES, "RESISTOR", Power=1/8W, Tolerance=5%, ComponentLink1Description=Linkedin, ComponentLink1URL=https://ir.linkedin.com/in/mahdi-bagherzade, Phone Number="0915 8700 314", Published Date=9-15-2024, Publisher="Mahdi Bagherzadeh", Type=SMD
S1A S1B S1C S2: library part "PUSH BUTTON", "SWITCH", ComponentLink1Description=Linkedin, ComponentLink1URL=https://ir.linkedin.com/in/mahdi-bagherzade, Phone Number="0915 8700 314", Published Date=9-15-2024, Publisher="Mahdi Bagherzadeh", Size=3x6mm, Type=2Pin-SMD
SC1 SC2 SC3 SC4: library part SCREW, "SCREW", ComponentLink1Description=Linkedin, ComponentLink1URL=https://ir.linkedin.com/in/mahdi-bagherzade, Phone Number="0915 8700 314", Published Date=9-15-2024, Publisher="Mahdi Bagherzadeh", Size=3mm
TP1 TP2 TP3 TP4 TP5 TP6 TP7 TP8 TP9 TP10 TP11 TP12 TP13: library part "TEST PIONT", ComponentLink1Description=Linkedin, ComponentLink1URL=https://ir.linkedin.com/in/mahdi-bagherzade, Phone Number="0915 8700 314", Published Date=9-15-2024, Publisher="Mahdi Bagherzadeh"
TR1: library part TEMINAL-2pin, "TERMINAL", Code=KF301-2Pin, ComponentLink1Description=Linkedin, ComponentLink1URL=https://ir.linkedin.com/in/mahdi-bagherzade, Phone Number="0915 8700 314", Published Date=9-15-2024, Publisher="Mahdi Bagherzadeh", Size=5.08mm, Type=Straight
U1: library part AT24C04, "IC", Code=AT24C04, ComponentLink1Description=Linkedin, ComponentLink1URL=https://ir.linkedin.com/in/mahdi-bagherzade, Phone Number="0915 8700 314", Published Date=9-15-2024, Publisher="Mahdi Bagherzadeh", Type=SMD
U2: library part ISD1730, "IC", Code=ISD1730, ComponentLink1Description=Linkedin, ComponentLink1URL=https://ir.linkedin.com/in/mahdi-bagherzade, Phone Number="0915 8700 314", Published Date=9-15-2024, Publisher="Mahdi Bagherzadeh", Type=SMD
U3: "ARM Cortex-M3 32-bit MCU, 256 KB Flash, 48 KB Internal RAM, 51 I/Os, 64-pin LQFP, -40 to 85 degC, Tray", I/Os (High Current)=51, Operating Frequency(F) (Processor speed) (MHz)=72, Supplier Part Number 1=497-9033-ND, Supply Voltage(Vcc) min (V)=2, A/D Converter="3x12-bit (16 Channel)", ComponentLink1Description="Manufacturer URL", ComponentLink1URL=http://www.st.com/web/en/home.html, ComponentLink2Description=Datasheet, ComponentLink2URL=http://www.st.com/st-web-ui/static/active/en/resource/technical/document/datasheet/CD00191185.pdf, ComponentLink3Description="Package Specification", ComponentLink3URL=http://www.st.com/st-web-ui/static/active/en/resource/technical/document/datasheet/DM00037051.pdf, Core="ARM Cortex-M3", D/A Converter="2x12-bit (2 Channel)", DatasheetVersion="Rev. 8", FLASH Size (Prog) (kB)=256, Internal RAM Size (kB)=48, Mounting Technology="Surface Mount", PackageDescription="64-Pin Low Profile Quad Flat Package, 10 x 10 mm Body, 0.5 mm Pitch", PackageReference=LQFP64, PackageVersion="Rev. 4, 06/2013", Packing=Tray, PartNumber=STM32F103RCT6, Supplier 1=Digi-Key, Supplier 2=Newark, Supplier 3=Newark, Supplier 4=Mouser, Supplier Part Number 2=01P4099, Supplier Part Number 3=57P1227, Supplier Part Number 4=511-STM32F103RCT6
U4: library part AMS1117, "REGULATOR", Voltage=3.3V, Code=AMS1117, ComponentLink1Description=Linkedin, ComponentLink1URL=https://ir.linkedin.com/in/mahdi-bagherzade, Phone Number="0915 8700 314", Published Date=9-15-2024, Publisher="Mahdi Bagherzadeh", Type=SMD
U5: library part 78Mxx, "REGULATOR", Voltage=5V, Code=7805, ComponentLink1Description=Linkedin, ComponentLink1URL=https://ir.linkedin.com/in/mahdi-bagherzade, Phone Number="0915 8700 314", Published Date=9-15-2024, Publisher="Mahdi Bagherzadeh", Type=THD
Y1: library part CRYSTAL, "CRYSTAL", ComponentLink1Description=Linkedin, ComponentLink1URL=https://ir.linkedin.com/in/mahdi-bagherzade, Phone Number="0915 8700 314", Published Date=9-15-2024, Publisher="Mahdi Bagherzadeh", Type=SMD
ZD1A ZD1B ZD1C ZD1D ZD1E ZD1F ZD1G ZD1H: library part DIODE-ZENER, "DIODE", Power=Minimelf, Voltage=3.3V, ComponentLink1Description=Linkedin, ComponentLink1URL=https://ir.linkedin.com/in/mahdi-bagherzade, Phone Number="0915 8700 314", Published Date=9-15-2024, Publisher="Mahdi Bagherzadeh", Type=SMD

## Via types
v1: diameter 1, hole 0.5, Top Layer to Bottom Layer, 108 vias
v2: diameter 1, hole 0.5, Top Layer to Bottom Layer, tented top, 54 vias

## Nets (pads, with @x,y where several pads share a name; then routed paths per layer and width w, separated by ;. In a path a pad name is that pad's centre, name@x,y a point inside that pad or via, vN(x,y) a via of type N, cw(c..) or ccw(c..) an arc to the next point about the centre after c; other vN are vias at no path point)
+3V3: C27.2 C28.2 FB1.2 FB3.1 FB4.1 FB5.1 R1A.1 R1B.1 R1C.1 R27.1 TP2.1 U4.2 U4.4 | length 105.2
  Top Layer w0.3: v2(11.4,12.9) R1C.1@11.4,14.35 11.675,14.35 12.55,15.225 12.55,16.816 11.4,17.966 R1B.1@11.4,20.95 ; 17.125,33.55 20.25,33.55 21.2,34.5 21.2,43.5 23.3,45.6 31.425,45.6 32.35,44.675 FB1.2@32.35,44.4 v1(33.9,44.4) ; FB3.1@24.1,10.45 24.1,12.2 TP2.1@25.4,13.5 ; v1(37.799,45.899) 38.492,46.592 39.65,47.75 47.3,47.75 48.175,48.625 FB5.1@48.175,48.9
  Top Layer w0.5: U4.4@17.1,23.348 17.223,23.225 31.343,23.225 32.25,24.132 FB4.1@32.25,24.4
  Top Layer w1: R1B.1@11.4,20.95 14.175,20.95 R27.1@14.2,20.925 ; R1A.1@11.4,27.55 11.675,27.55 15.477,23.748 U4.4@16.25,23.748 ; R27.1@14.2,20.9 R27.1@14.2,20.925 ; U4.4@16.7,23.348 16.25,23.348 15.85,22.948 15.85,22.825 14.2,21.175 R27.1@14.2,20.925 ; U4.2@17.1,29.6 C28.2@17.1,32.2 ; C28.2@17.1,32.475 17.125,32.5 17.125,33.55 C27.2@17.125,34.7
  Bottom Layer w0.3: v2(11.4,12.9) 12.1,12.2 24.1,12.2 TP2.1@25.4,13.5 ; v1(33.9,44.4) 36.3,44.4 v1(37.799,45.899)
+5: C25.2 C26.2 C31.1 C32.1 C35.1 C37.1 CN4.3 FB2.1 LED4.1 U4.3 U5.3 | length 154.6
  Top Layer w0.3: FB2.1@66.675,15.4 67.916,15.4 70.95,12.366 70.95,10.55 71.775,9.725 v1@75.4,9.725 ; C31.1@83.175,9.7 C31.1@83.2,9.725 83.212,9.713 C31.1@83.25,9.675 ; C32.1@85.687,9.713 C32.1@85.7,9.7
  Top Layer w0.5: v1(75.4,8.5) v1(75.4,9.7) C31.1@83.175,9.7 ; C31.1@83.212,9.713 C32.1@85.687,9.713 ; CN4.3@83.25,5 C31.1@83.25,9.675
  Top Layer w0.7: U5.3@2.4,36.92 2.649,37.169 3.769,37.169 9.66,43.06 14.379,43.06 C35.1@14.8,43.06 16.64,43.06 17.3,42.4 C37.1@17.3,39.7 ; U4.3@14.8,29.6 C26.2@14.8,32.2 14.8,34.4 14.775,34.425 C25.2@14.775,34.7 14.775,34.975 15.5,35.7 15.964,35.7 16.646,36.382 18.093,36.382 18.8,37.089 v2@18.8,37.782 ; LED4.1@14.8,39.7 C37.1@17.3,39.7 ; v1(20,38) 19.018,38 v2@18.8,37.782 ; C37.1@17.3,39.7 17.575,39.7 18.8,38.475 v2@18.8,37.782
  Bottom Layer w0.5: v2(19,38) v1(20,38) 26.8,31.2 33,31.2 35.1,29.1 36,29.1 36.648,28.452 36.648,25.752 38.9,23.5 38.9,21.5 40.3,20.1 43,20.1 44.7,18.4 44.7,5.85 49.75,0.8 71.2,0.8 72.8,2.4 72.8,5.9 v1(75.4,8.5) v1(75.4,9.7)